# Altium PCB PCB1.PcbDoc
Units mil, origin at the board's own origin, x right, y up, seen from the top; angles counter-clockwise.
Board outline 1614.16 x 1181.97 mil, 2 copper layers (Top Layer, Bottom Layer), stack 60.4 mil thick; 12 components, 4 nets, 138 pads, 2 vias.
Unrouted connection lines stored in the file: 17.
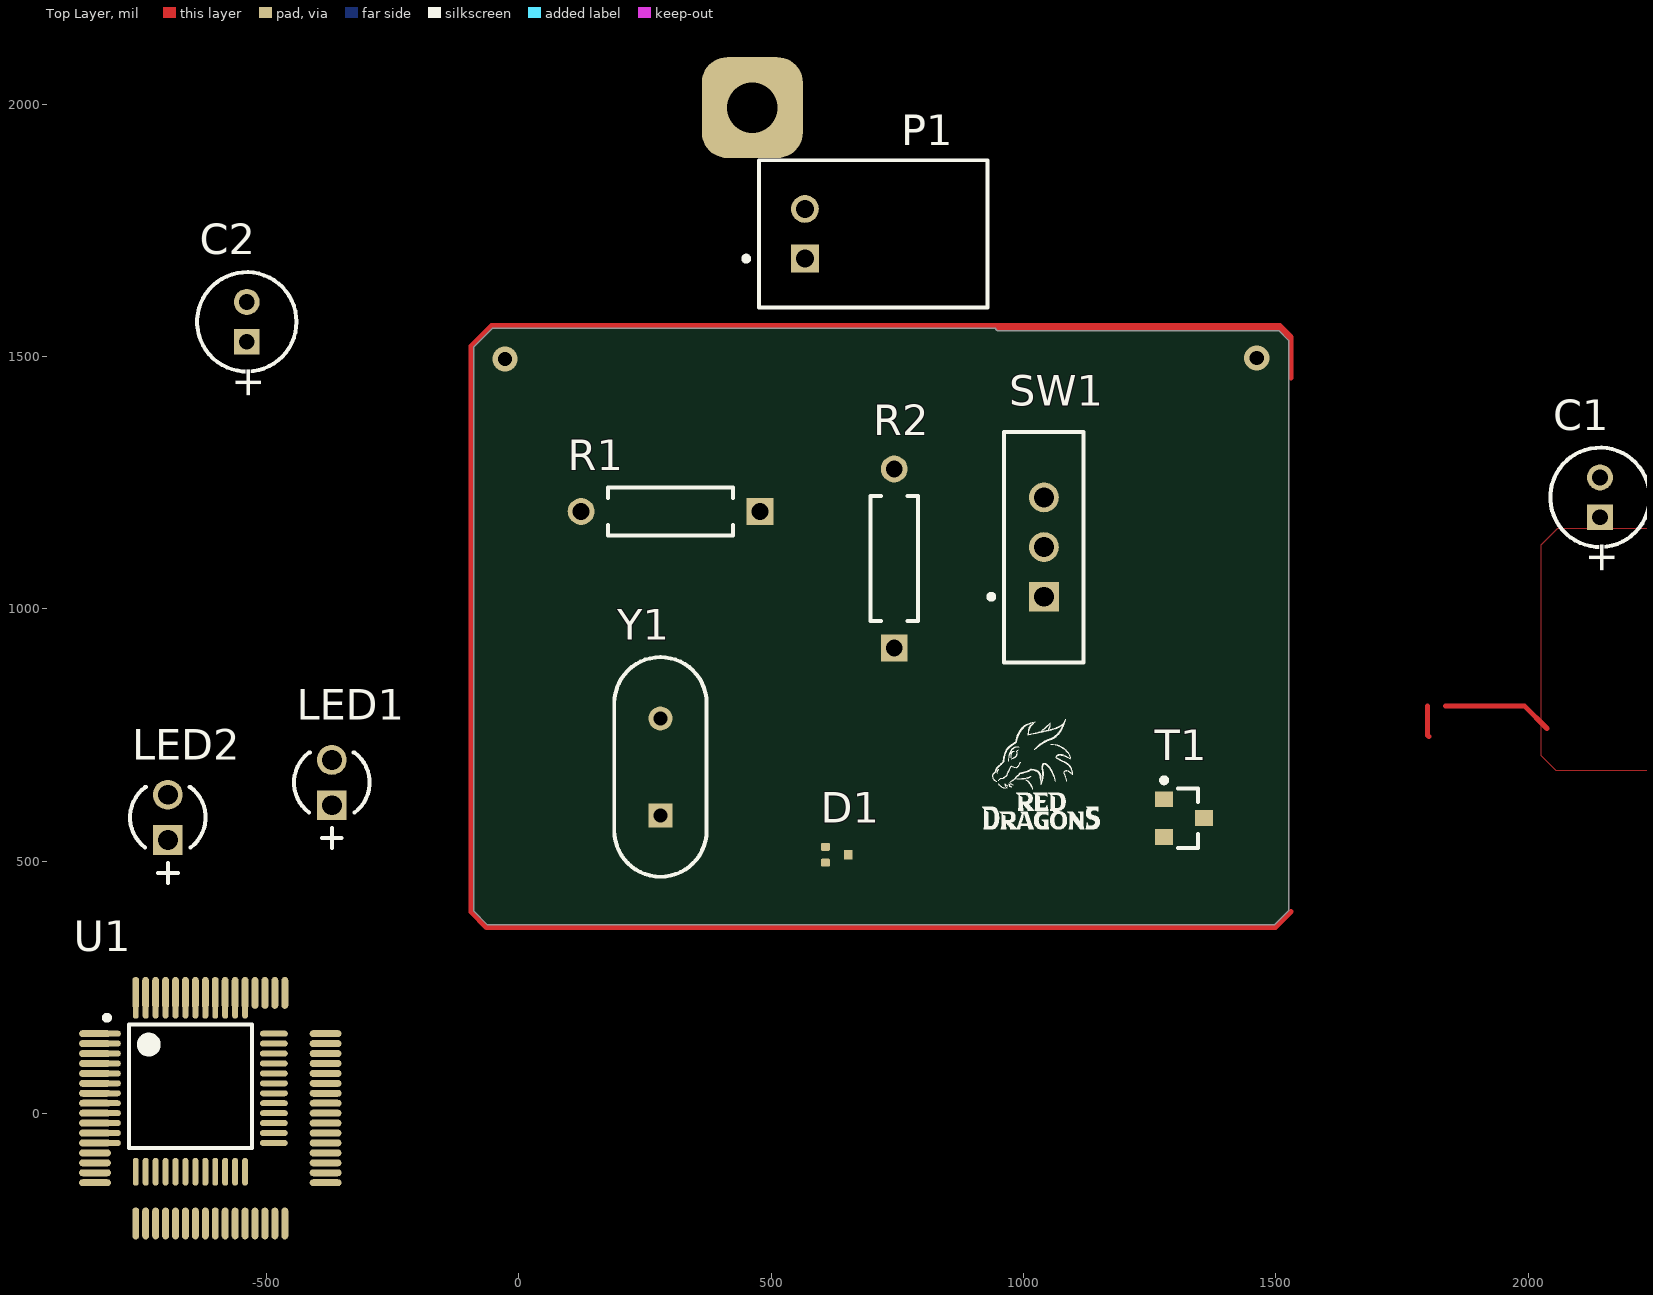
[diagram p0: Top Layer view]
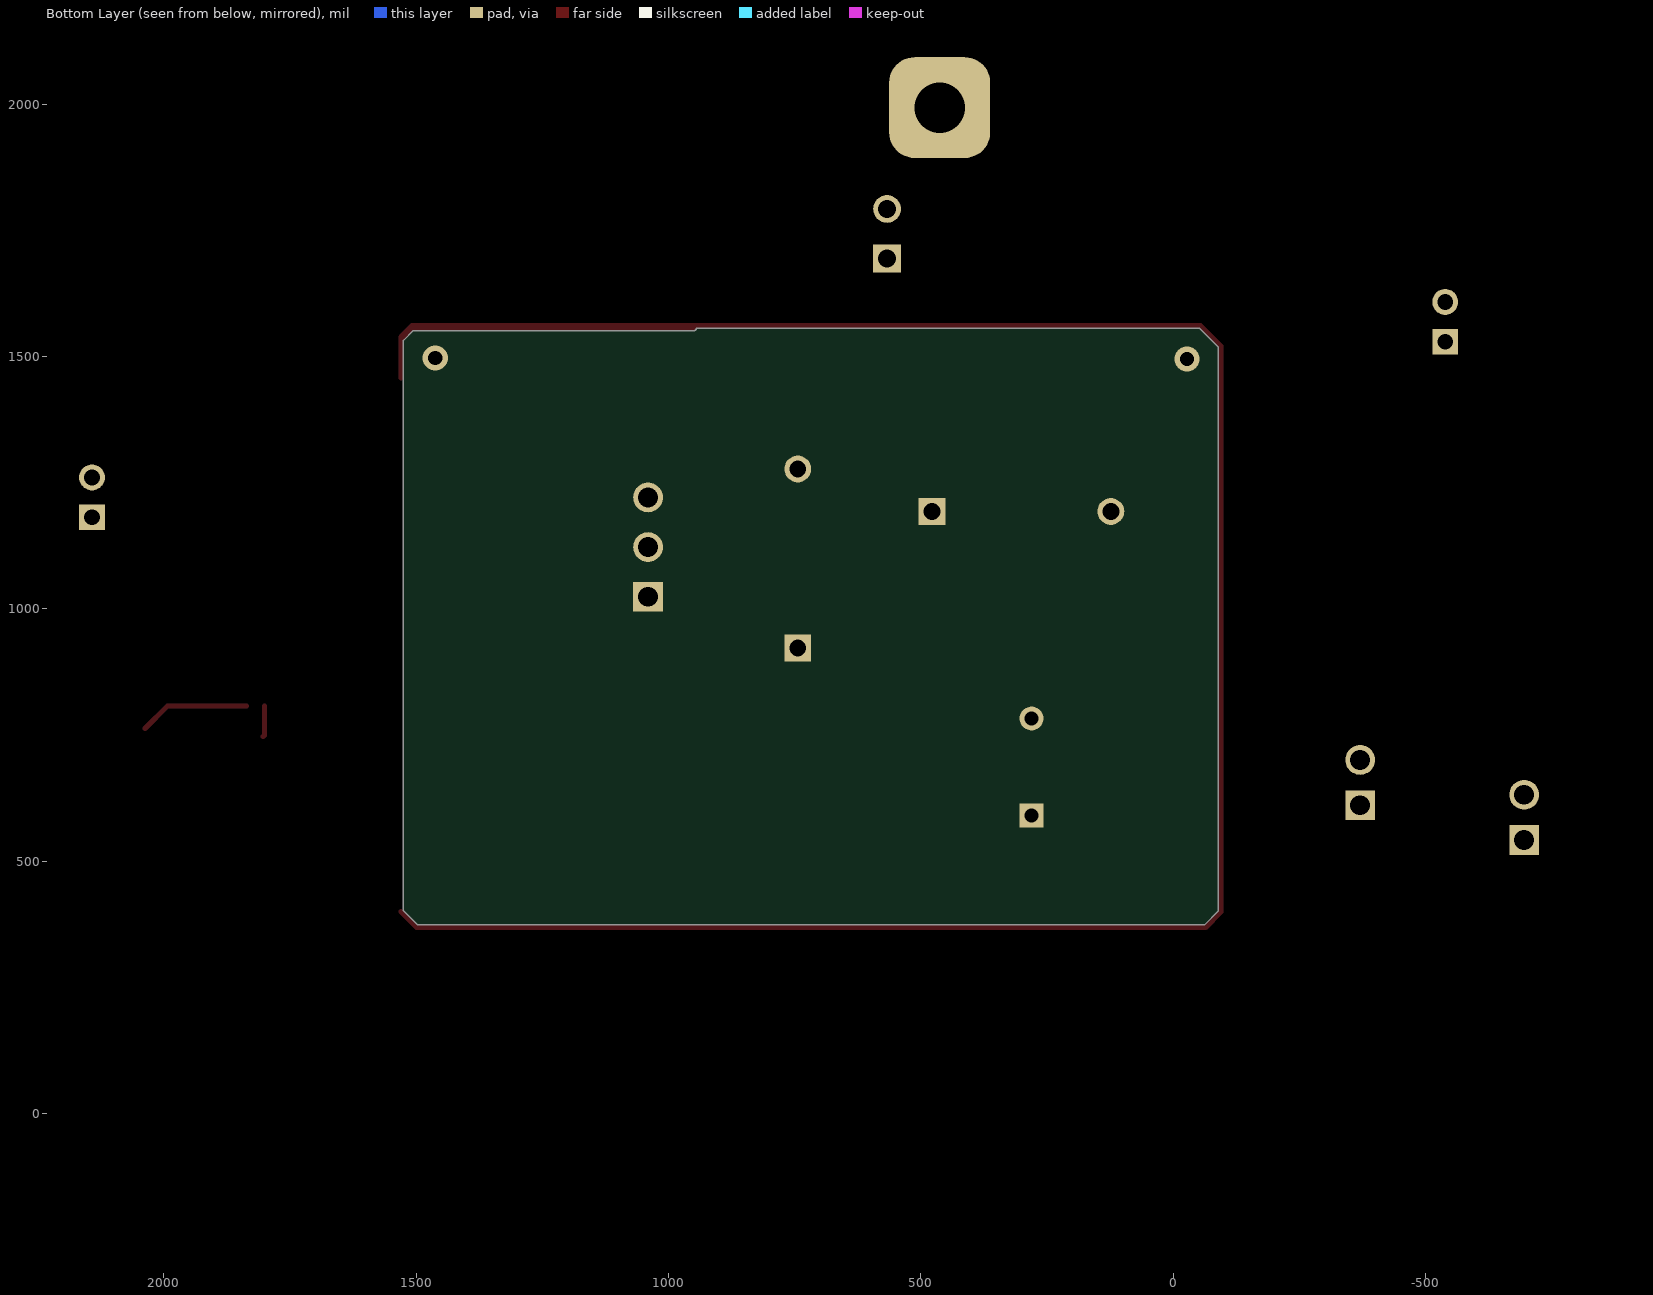
[diagram p1: Bottom Layer view, seen from below]

## Layer stack, top to bottom
Top Solder: solder mask 0.5, Solder Resist, Dk 3.3
Top Layer: signal copper 0.7
Dielectric1: core 59, FR-4, Dk 4.3
Bottom Layer: signal copper 0.7
Bottom Solder: solder mask 0.5, Solder Resist, Dk 3.3

## Board outline
-88.99,401.46 -61.54,374.01 775.79,374.01 cw(c775.79,369) 775.86,374.01 1496.92,374.01 1525.18,402.27 1525.18,1531.73 1505.94,1550.97 949.92,1550.97 cw(c949.92,1555.99) 944.91,1555.98 -51.92,1555.98 -88.99,1518.92

## Design rules (kind name [scope] priority, off if disabled: settings)
Clearance [All] p1: gap=10 ignorepadtopadclearanceinfootprint=FALSE
DiffPairsRouting [All] p1: maxlimit=10 minlimit=10 mostfreqgap=10 toplayer_minwidth=10 toplayer_maxwidth=10 toplayer_prefwidth=10 bottomlayer_minwidth=10 bottomlayer_maxwidth=10 bottomlayer_prefwidth=10 maxuncoupledlength=500
HoleSize [All] p1: absolutevalues=TRUE maxlimit=300 minlimit=10 maxpercent=80.000 minpercent=20.000
MinimumAnnularRing [All] p1: minimumring=10
PasteMaskExpansion [All] p1: expansion=10
PlaneClearance [All] p1: clearance=15
PlaneConnect [All] p1: pad.planeconnectstyle=Relief pad.reliefexpansion=20 pad.reliefentries=4 pad.reliefconductorwidth=10 pad.reliefairgap=10 via.planeconnectstyle=Direct via.reliefexpansion=20 via.reliefentries=4 via.reliefconductorwidth=10 via.reliefairgap=10
PolygonConnect [All] p1: thpad.connectstyle=Relief thpad.reliefconductorwidth=10 thpad.reliefentries=4 thpad.polygonreliefangle="90 Angle" thpad.airgapwidth=10 smdpad.connectstyle=Relief smdpad.reliefconductorwidth=10 smdpad.reliefentries=4 smdpad.polygonreliefangle="90 Angle" smdpad.airgapwidth=10 via.connectstyle=Direct via.reliefconductorwidth=10 via.reliefentries=4 via.polygonreliefangle="90 Angle" via.airgapwidth=10
RoomDefinition Sheet1 [InComponentClass('Sheet1')] p1: confinementstyle=ConfineIn formatcopy=TRUE lockcomponents=FALSE outline 1515,508 2426,508 2426,987 1515,987
RoutingVias [All] p1: holewidth=10 width=20 viastyle="Through Hole" minholewidth=10 minwidth=20 maxholewidth=10 maxwidth=20
SMDNeckDown [All] p1: percent=100.000
SilkToSolderMaskClearance SilkscreenOverComponentPads [IsPad] p1: minsilkscreentomaskgap=10 clearancetoexposedcopper=TRUE
SolderMaskExpansion [All] p1: expansion=10 istentingtop=FALSE
Width [All] p1: maxlimit=10 minlimit=10 preferedwidth=10
24 further rules are at their usual default settings.

## Components (designator, comment, footprint, x,y, rotation, side; value= is the part's Value field where it differs from the comment)
C1 "ECA1HM220" CAPPR55-200-1100X500X1200 2142,1221 r90 top value=22µF
C2 "ECA1HM220" CAPPR55-200-1100X500X1200 -538.43,1568.63 r90 top value=22µF
D1 "DAN222M3T5G" ROHM-SOT723-3_V 630.36,513 r0 top
LED1 "304090041" LED-2P-2.28-3MM_A -370,656 r90 top
LED2 "304090041" LED-2P-2.28-3MM_A -694.84,587 r90 top
P1 "S2B-XH-A(LF)(SN)" JST-S2B-XH-A(LF)(SN)_V 567,1743 r90 top
R1 "MFR-25FBF52-22K1" RESA60-630X240 301,1193 r180 top value=22.1k
R2 "MFR-25FBF52-22K1" RESA60-630X240 744,1100 r90 top value=22.1k
SW1 "EG1218" ESWI-EG1218_V 1040.61,1122.43 r90 top
T1 "MMBT3904LT1G" ONSC-SOT-23-3-318-08_V 1318,585.62 r0 top
U1 "STM32F103R8T6" TSQFP50P1200X1200X160-64M -610.74,11 r0 top
Y1 "49S/18PF" JPY-49S-18PF 281,686.94 r90 top

## Footprints (in the part's own frame and the unit in brackets; to place one, negate y for a bottom-side part, rotate by r counter-clockwise, add the part's x,y. Pads: shape width x height; smd on the part's side, far side on the other; paste and mask are expansions set on the pad)
CAPPR55-200-1100X500X1200 [mm] "THD, 2-Leads, Dia 5mm, Pin Spacing 2mm"
  rect 1.3x1.3 hole 0.8: 1(-1,0)
  round 1.3 hole 0.8: 2(1,0)
  silkscreen extent -2.5,-2.5 2.5,2.5, body extent -2.5,-2.5 2.45,2.5, height 12
ESWI-EG1218_V [mm] "THD, 3-Leads, Body 11.6x4mm, Pitch 2.5mm"
  rect 1.5x1.5 hole 1: 1(-2.5,0)
  round 1.5 hole 1: 2(0,0) 3(2.5,0)
  silkscreen extent -5.8,-2 5.8,2.77, body extent -5.8,-2 5.8,2, height 7.4
JPY-49S-18PF [mm] "THD, 2-Leads, Body 11.05x4.65mm, Pitch 4.88mm"
  rect 1.2x1.2 hole 0.7: 1(-2.44,0)
  round 1.2 hole 0.7: 2(2.44,0)
  silkscreen extent -5.53,-2.32 5.53,2.32, body extent -5.52,-2.32 5.53,2.33, height 3.5
JST-S2B-XH-A(LF)(SN)_V [mm] "Header, 2-Leads, Body 7.4x11.5mm, Pitch 2.5mm"
  rect 1.4x1.4 hole 0.9: 1(-1.25,0)
  round 1.4 hole 0.9: 2(1.25,0)
  silkscreen extent -3.7,-9.2 3.7,3.07, body extent -3.7,-9.2 3.7,2.3, height 5.95
LED-2P-2.28-3MM_A [mm] "LED, 2-Leads, Dia 3mm, Pitch 2.28mm"
  rect 1.5x1.5 hole 1: 1(-1.14,0)
  round 1.5 hole 1: 2(1.14,0)
  silkscreen extent -3.29,-1.9 1.52,1.9, body extent -1.9,-1.91 1.52,1.91, height 5.3
ONSC-SOT-23-3-318-08_V [mm] "SOT23, 3-Leads, Body 3.04x1.4mm, Pitch 0.95mm"
  rect 0.9x0.8 smd: 1(-1,0.95) 2(-1,-0.95) 3(1,0)
  silkscreen extent -1.12,-1.5 0.7,2.02, body extent -1.42,-1.52 1.42,1.52, height 1.11
RESA60-630X240 [mm] "Axial Resistor, 2-Leads, Dia 2.4mm, Body Length 6.3mm"
  rect 1.35x1.35 hole 0.85: 1(-4.5,0)
  round 1.35 hole 0.85: 2(4.5,0)
  silkscreen extent -3.15,-1.2 3.15,1.2, body extent -4.77,-1.19 4.77,1.2, height 2.4
ROHM-SOT723-3_V [mm] "SOT723, 3-Leads, Body 1.2x0.8mm, Pitch 0.8mm"
  rrect30% 0.45x0.4 smd: 1(-0.575,0.4) 2(-0.575,-0.4)
  rrect30% 0.45x0.5 smd: 3(0.575,0)
  body extent -0.53,-0.63 0.53,0.63, height 0.45
TSQFP50P1200X1200X160-64M [mm] "TSQFP, 64-Leads, Body 10,00x10,00mm, Pitch 0,50mm, IPC Low Density"
  oval 1.6x0.35 smd: 1(-5.8,3.75) 2(-5.8,3.25) 3(-5.8,2.75) 4(-5.8,2.25) 5(-5.8,1.75) 6(-5.8,1.25) 7(-5.8,0.75) 8(-5.8,0.25) 9(-5.8,-0.25) 10(-5.8,-0.75) 11(-5.8,-1.25) 12(-5.8,-1.75) 13(-5.8,-2.25) 14(-5.8,-2.75) 15(-5.8,-3.25) 16(-5.8,-3.75) 33(5.8,-3.75) 34(5.8,-3.25) 35(5.8,-2.75) 36(5.8,-2.25) 37(5.8,-1.75) 38(5.8,-1.25) 39(5.8,-0.75) 40(5.8,-0.25) 41(5.8,0.25) 42(5.8,0.75) 43(5.8,1.25) 44(5.8,1.75) 45(5.8,2.25) 46(5.8,2.75) 47(5.8,3.25) 48(5.8,3.75)
  oval 1.4x0.3 smd: 1(-5.2,3.75) 2(-5.2,3.25) 3(-5.2,2.75) 4(-5.2,2.25) 5(-5.2,1.75) 6(-5.2,1.25) 7(-5.2,0.75) 8(-5.2,0.25) 9(-5.2,-0.25) 10(-5.2,-0.75) 11(-5.2,-1.25) 12(-5.2,-1.75) 37(3.2,-1.75) 38(3.2,-1.25) 39(3.2,-0.75) 40(3.2,-0.25) 41(3.2,0.25) 42(3.2,0.75) 43(3.2,1.25) 44(3.2,1.75) 45(3.2,2.25) 46(3.2,2.75) 47(3.2,3.25) 48(3.2,3.75)
  oval 0.35x1.6 smd: 17(-3.75,-5.8) 18(-3.25,-5.8) 19(-2.75,-5.8) 20(-2.25,-5.8) 21(-1.75,-5.8) 22(-1.25,-5.8) 23(-0.75,-5.8) 24(-0.25,-5.8) 25(0.25,-5.8) 26(0.75,-5.8) 27(1.25,-5.8) 28(1.75,-5.8) 29(2.25,-5.8) 30(2.75,-5.8) 31(3.25,-5.8) 32(3.75,-5.8) 49(3.75,5.8) 50(3.25,5.8) 51(2.75,5.8) 52(2.25,5.8) 53(1.75,5.8) 54(1.25,5.8) 55(0.75,5.8) 56(0.25,5.8) 57(-0.25,5.8) 58(-0.75,5.8) 59(-1.25,5.8) 60(-1.75,5.8) 61(-2.25,5.8) 62(-2.75,5.8) 63(-3.25,5.8) 64(-3.75,5.8)
  oval 0.3x1.4 smd: 17(-3.75,-3.2) 18(-3.25,-3.2) 19(-2.75,-3.2) 20(-2.25,-3.2) 21(-1.75,-3.2) 22(-1.25,-3.2) 23(-0.75,-3.2) 25(0.25,-3.2) 26(0.75,-3.2) 27(1.25,-3.2) 28(-0.25,-3.2) 48(1.75,-3.2) 53(1.75,5.2) 54(1.25,5.2) 55(0.75,5.2) 56(0.25,5.2) 57(-0.25,5.2) 58(-0.75,5.2) 59(-1.25,5.2) 60(-1.75,5.2) 61(-2.25,5.2) 62(-2.75,5.2) 63(-3.25,5.2) 64(-3.75,5.2)
  silkscreen extent -5.32,-2 2.1,4.67, body extent -5.5,-3.5 3.5,5.5, height 1.6

## Part data
C1 C2: library part CMP-001-00027-7, "Aluminum Electrolytic Capacitor, 22 uF, +/- 20%, 50 V, -40 to 85 degC, 2-Pin THD, RoHS, Bulk", Capacitor Type=Electrolytic, Case/Package=Radial, Manufacturer=Panasonic, Max Operating Temperature=85°C, Min Operating Temperature=-40°C, Package Description="2-Pin Radial Lead, Dia 5 mm, Height 12 mm", Package Quantity=200, Package Reference=CAPPR55-200-1100X500X1200, Ripple Current=100mA, Tolerance=20%, Voltage Rating=50V, Datasheet URL=https://industrial.panasonic.com/cdbs/www-data/pdf/RDF0000/ABA0000C1218.pdf, Datasheet Version="Rev. 05, 10/2016", Diameter=5mm, Lead Pitch=2mm, Manufacturer URL=http://www.panasonic.com/, Mounting Technology=TH, Packaging=Bulk, Pins=2, Ripple Current (AC)=100mA, RoHS Compliant=True
D1: library part CMP-004-00027-3, "Common Cathode Silicon Dual Switching Diodes, 3-Pin SOT-723, Pb-Free, Tape and Reel", Forward Current=100mA, ComponentLink1Description="Manufacturer URL", ComponentLink1URL=http://www.onsemi.com/, ComponentLink2Description=Datasheet, ComponentLink2URL=http://www.onsemi.cn/pub_link/Collateral/DAN222M3-D.PDF, ComponentLink3Description="Package Specification", ComponentLink3URL=http://www.onsemi.com/pub_link/Collateral/631AA.PDF, Mounting Technology=SMT, Pins=3
LED1 LED2: library part CMP-007-00007-2, "Red LED, 80 mW, 30 mA, -25 to 85 degC, 2-Pin THD", Manufacturer="Shenzhen CGX", Package Description="2-Pin Through Hole Device, Dia 3 mm, Pitch 2.28 mm", Case/Package=304090041, Datasheet URL=http://datasheet.octopart.com/304090041-Chengguangxing-datasheet-62330656.pdf, Datasheet Version=Sep-14, Manufacturer URL=http://szcgx.com/, Mounting Technology=TH, Package Reference=304090041, RoHS Compliant=Unknown
P1: library part CMP-002-00032-2, "Male Header, Pitch 2.5 mm, 1 x 2 Position, Height 6.1 mm, Tail Length 3.4 mm, -25 to 85 degC, RoHS, Bulk", Manufacturer=JST, Max Operating Temperature=85°C, Min Operating Temperature=-25°C, Package Description="XH Series Disconnectable Crimp Style Connector, Pitch 2.5 mm, 1 x 2 Position, Height 6.1 mm, Tail Length 3.4 mm", Case/Package=S2B-XH-A(LF)(SN), Connector Type=Header, Datasheet URL=http://www.jst-mfg.com/product/pdf/eng/eXH.pdf, Datasheet Version=May-16, Gender=Male, Manufacturer URL=http://www.jst.com/home2.html, Mounting Technology=TH, Package Reference=S2B-XH-A(LF)(SN), RoHS Compliant=Unknown
R1 R2: library part CMP-009-00052-4, "Axial Resistor, 22.1 KOhm, +/- 1%, 0.25 W, -55 to 155 degC, 2-Pin THD, RoHS, Bulk", Case/Package=Axial, Manufacturer=Yageo, Max Operating Temperature=155°C, Min Operating Temperature=-55°C, Package Description="2-Pin Axial Lead, Dia 2.4 mm, Body Length 6.3 mm", Package Quantity=200, Package Reference=MFR-25, Power=250mW, Tolerance=1%, Voltage Rating=250V, Datasheet URL=http://www.yageo.com/documents/recent/Yageo%20LR_MFR_2013.pdf, Datasheet Version=Apr-13, Manufacturer URL=http://www.yageo.com/, Mounting Technology=TH, Packaging=Bulk, RoHS Compliant=True
SW1: library part CMP-011-00006-2, "Slide Switch, SPDT, 500 V, -20 to 70 degC, 3-Pin THD, RoHS, Bulk", Contact Current Rating=200mA, Manufacturer=E-Switch, Max Operating Temperature=70°C, Min Operating Temperature=-20°C, Operating Force=250gf, Package Description="3-Pin Through Hole Device, Body 11.6 x 4 mm, Pitch 2.5 mm", Package Quantity=1000, Voltage Rating (AC)=30V, Case/Package=EG1218, Contact Finish=Silver, Contact Material=Copper, Contact Plating=Silver, Current Rating=200mA, Datasheet URL=https://www.e-switch.com/system/asset/product_line/data_sheet/119/EG.pdf, Datasheet Version=Oct-15, Manufacturer URL=http://www.e-switch.ch/en/, Mounting Technology=TH, Package Reference=EG1218, Packaging=Bulk, Pins=3, RoHS Compliant=True, Throw Configuration=SPDT, Voltage Rating (DC)=30V
T1: library part CMP-013-00007-3, "General Purpose Transistor, NPN Silicon, 40 V, 0.2 A, -55 to 150 degC, 3-Pin SOT23, RoHS, Tape and Reel", Case/Package=TO-236-3, Frequency=300MHz, Manufacturer="ON Semiconductor", Max Operating Temperature=150°C, Min Operating Temperature=-55°C, Package Description="3-Pin Small Outline Transistor, Body 2.9 x 1.3 mm, Pitch 0.95 mm", Package Quantity=3000, Package Reference="SOT-23 (318-08)", Power=225mW, Datasheet URL=http://www.onsemi.cn/pub_link/Collateral/MMBT3904LT1-D.PDF, Datasheet Version="Rev. 12, 11/2012", Elements=1, hFE Min=80, Mounting Technology=SM, Packaging=TapeandReel, Pins=3, RoHS Compliant=True, Vce Max=300mV
U1: "STM32 ARM-based 32-bit MCU with 64 Kbytes Flash, 64-pin LQFP, Industrial Temperature", ComponentLink1Description="Manufacturer Link", ComponentLink1URL=www.st.com/stm32, ComponentLink2Description=Datasheet, ComponentLink2URL=http://www.st.com/stonline/products/literature/ds/13587.pdf, DatasheetVersion="rev6, Mar-2008", PackageDescription="64-Pin Low-Profile Quad Flat Pack, 10 x 10 mm Body, 0.5 mm Pitch (LQFP64)", PackageReference=LQFP64, PackageVersion=Mar-2008, Published=30-May-2008, Publisher="Altium Limited"
Y1: library part CMP-003-00000-2, "Crystal, 16 MHz, +/-20 ppm, 18 pF, -20 to 70 degC, 2-Pin THD, RoHS", Case/Package=49S-18PF, Frequency=16MHz, Manufacturer="Shenzhen Jingpengyuan", Package Description="2-Pin Through Hole Device, Body 11.05 x 4.65 mm, Pitch 4.88 mm", Datasheet URL=http://datasheet.octopart.com/49S-18PF-Xinhunjing-datasheet-30677139.pdf, Datasheet Version=Aug-14, Manufacturer URL=http://www.chjiahui.com/, Mounting Technology=TH, Package Reference=49S-18PF, RoHS Compliant=Unknown

## Free pads (board coordinates)
  rrect50% 200x200 hole 100: 6(463,1993)

## Via types
v1: diameter 50, hole 28, Top Layer to Bottom Layer, 2 vias

## Nets (pads, with @x,y where several pads share a name; then routed paths per layer and width w, separated by ;. In a path a pad name is that pad's centre, name@x,y a point inside that pad or via, vN(x,y) a via of type N, cw(c..) or ccw(c..) an arc to the next point about the centre after c; other vN are vias at no path point)
GND: C2.2 D1.1 LED1.2 LED2.2 P1.1 SW1.1 T1.3 Y1.1
NetC1_1: C1.1 LED2.1 R2.2
NetC1_2: C1.2 C2.1 LED1.1 R1.2 | length 62.1
  Top Layer w10: 1800.28,808 1800.28,749.72 1803,747
NetP1_2: P1.2 R1.1 R2.1 U1.33 | length 219.8
  Top Layer w10: 1835.72,808 1992.21,808 2037,763.21
pads on no net: D1.2 D1.3 SW1.2 SW1.3 T1.1 T1.2 U1.1 U1.2 U1.3 U1.4 U1.5 U1.6 U1.7 U1.8 U1.9 U1.10 U1.11 U1.12 U1.13 U1.14 U1.15 U1.16 U1.17 U1.18 U1.19 U1.20 U1.21 U1.22 U1.23 U1.24 U1.25 U1.26 U1.27 U1.28 U1.29 U1.30 U1.31 U1.32 U1.34 U1.35 U1.36 U1.37 U1.38 U1.39 U1.40 U1.41 U1.42 U1.43 U1.44 U1.45 U1.46 U1.47 U1.48 U1.49 U1.50 U1.51 U1.52 U1.53 U1.54 U1.55 U1.56 U1.57 U1.58 U1.59 U1.60 U1.61 U1.62 U1.63 U1.64 Y1.2
copper on no net: | length 5924.6
  Top Layer w10: -94,810.46 -94,1521 -54,1561 952,1561 1508.01,1561 1530.19,1538.82 1530.19,1457.52 ; -94,815 -94,399.39 -63.61,369 775.79,369 ; -42,369 967,369 ; 949.92,1555.99 1508.01,1555.99 1530.19,1533.81 ; 956.74,369 1499,369 1530.19,400.19
  other v1: -27,1495 1462,1497

## Polygon pours and split planes (outlines as drawn)
GND on Top Layer "GND_L01_P003" (solid, pour order 3): 2024.5,710.39 2054.89,680 2894.29,680 2935.5,721.21 2935.5,1126 2902.5,1159 2057.5,1159 2024.5,1126

## Silkscreen, mask and mechanical layers (free items; w line width, h text height)
Top Overlay:
  drawing of 95 lines, arcs and shapes, not listed

## Text inside footprints (layer, text, board x,y; h text height)
C1: Top Overlay "+" at 2171.02,1067.14 h59.06 r90
C2: Top Overlay "+" at -509.41,1414.77 h59.06 r90